# Altium PCB powersupply.PcbDoc
Units mil, origin at the board's own origin, x right, y up, seen from the top; angles counter-clockwise.
Board outline 6955 x 4000 mil, 2 copper layers (Top Layer, Bottom Layer); 37 components, 15 nets, 77 pads, 2 vias.
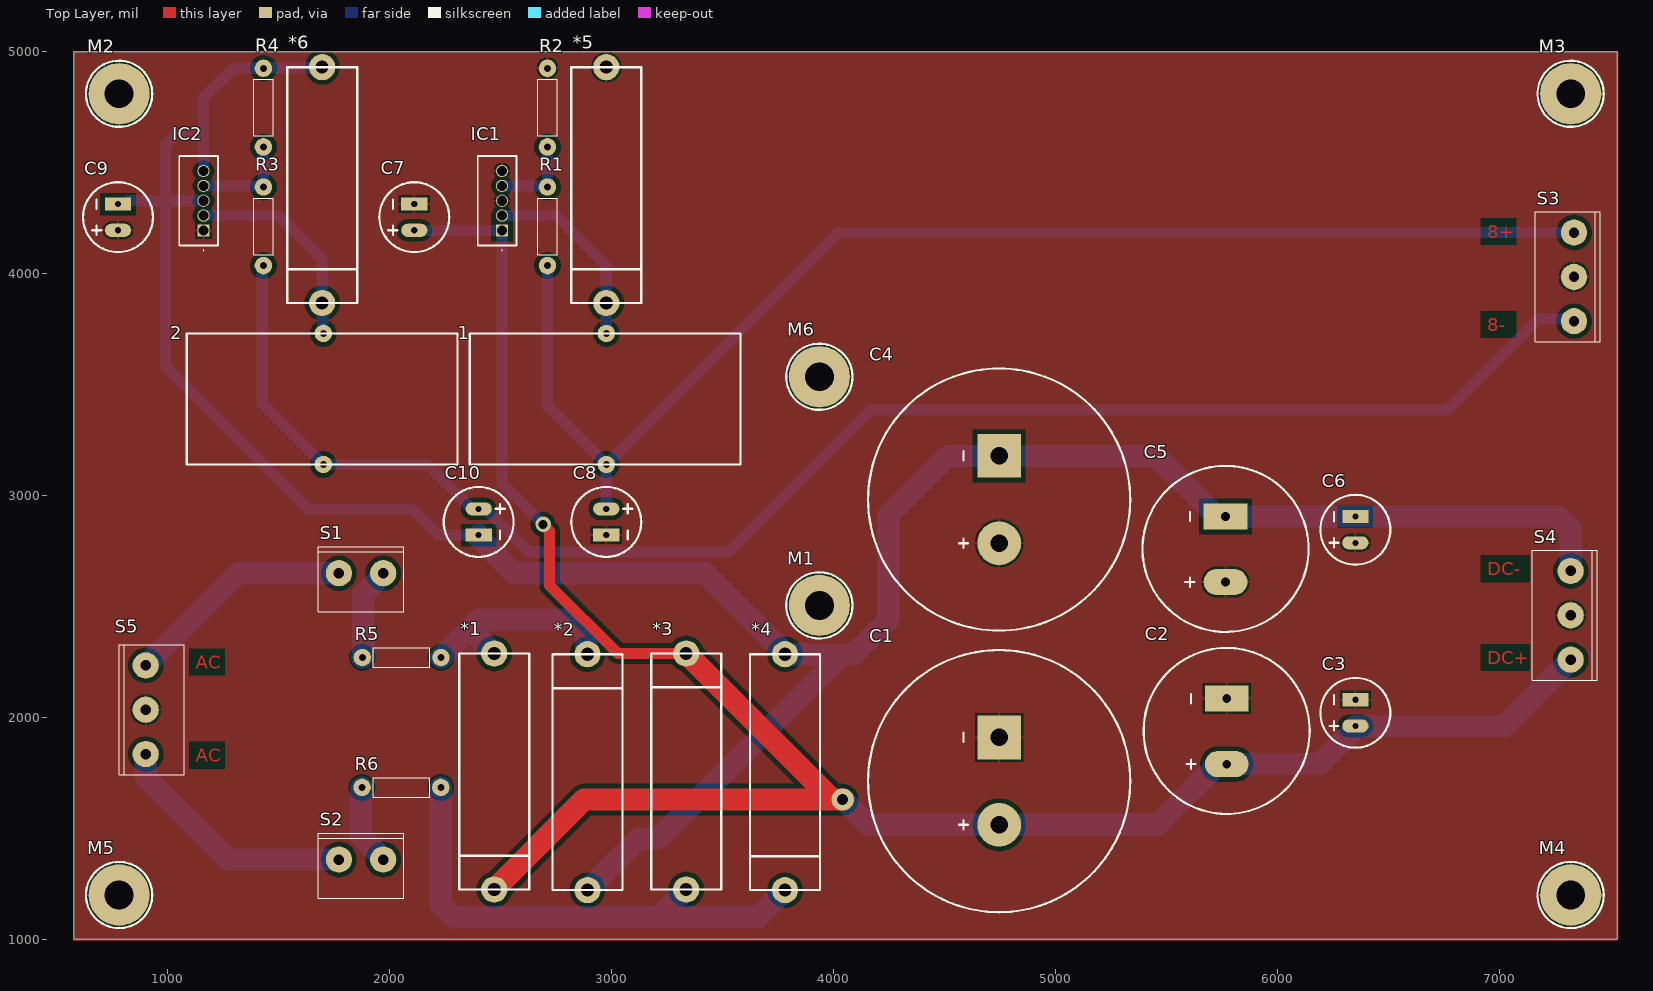
[diagram p0: Top Layer view]
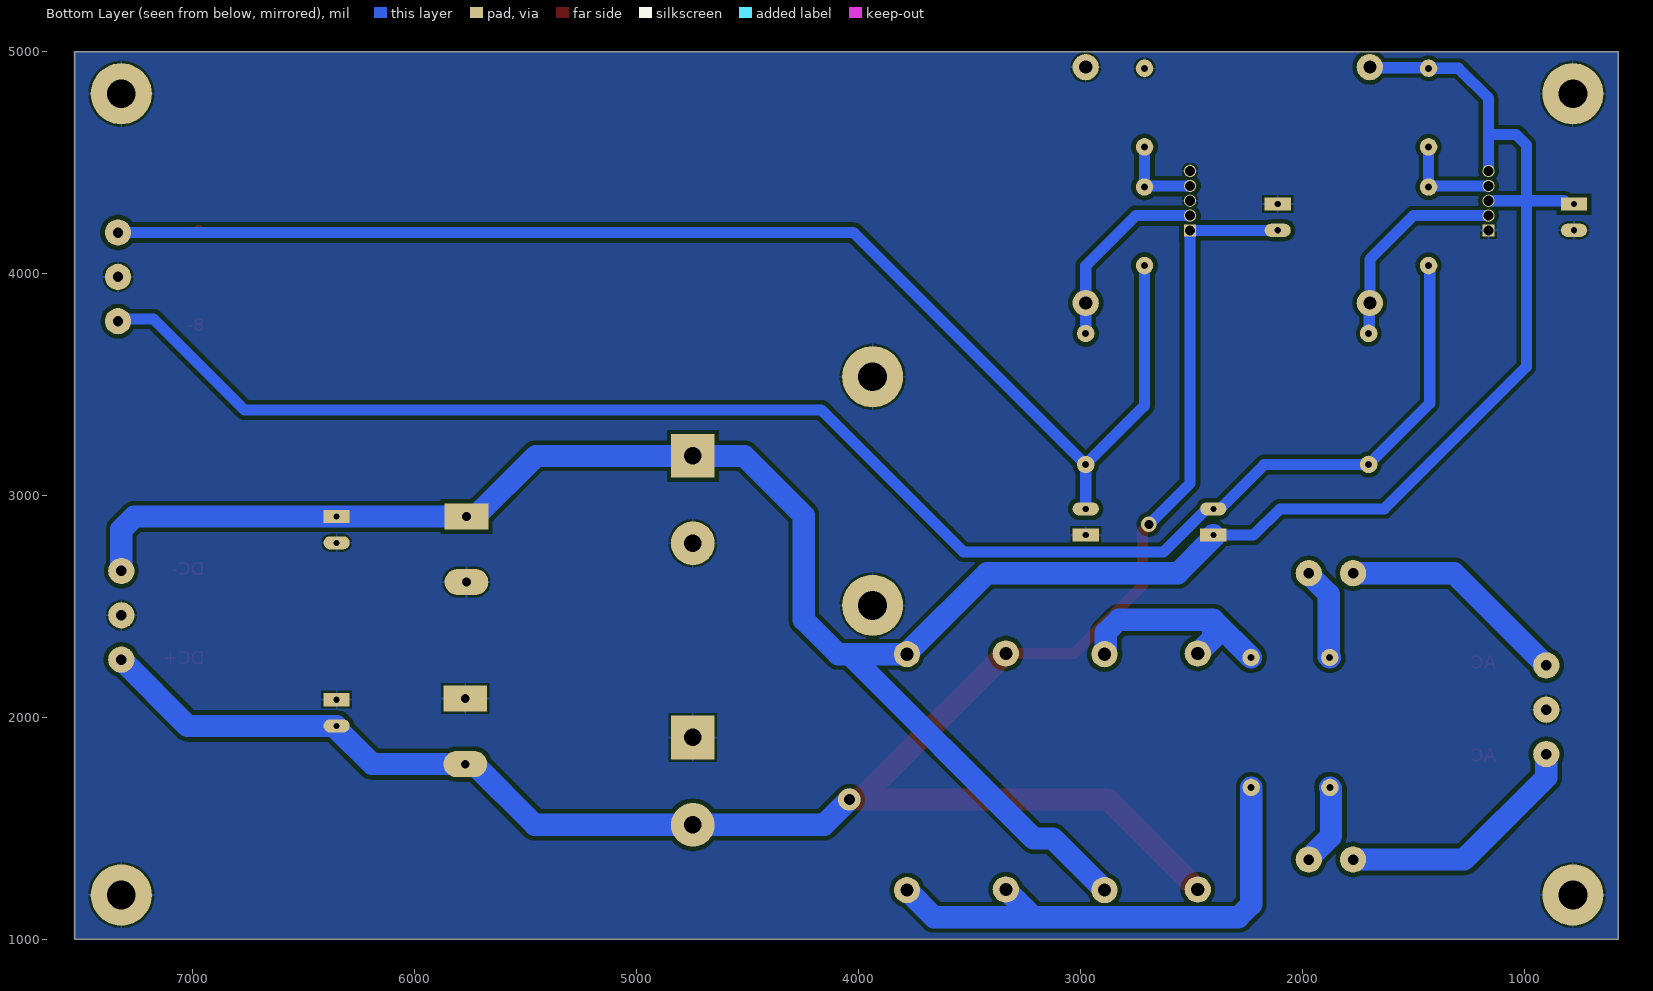
[diagram p1: Bottom Layer view, seen from below]
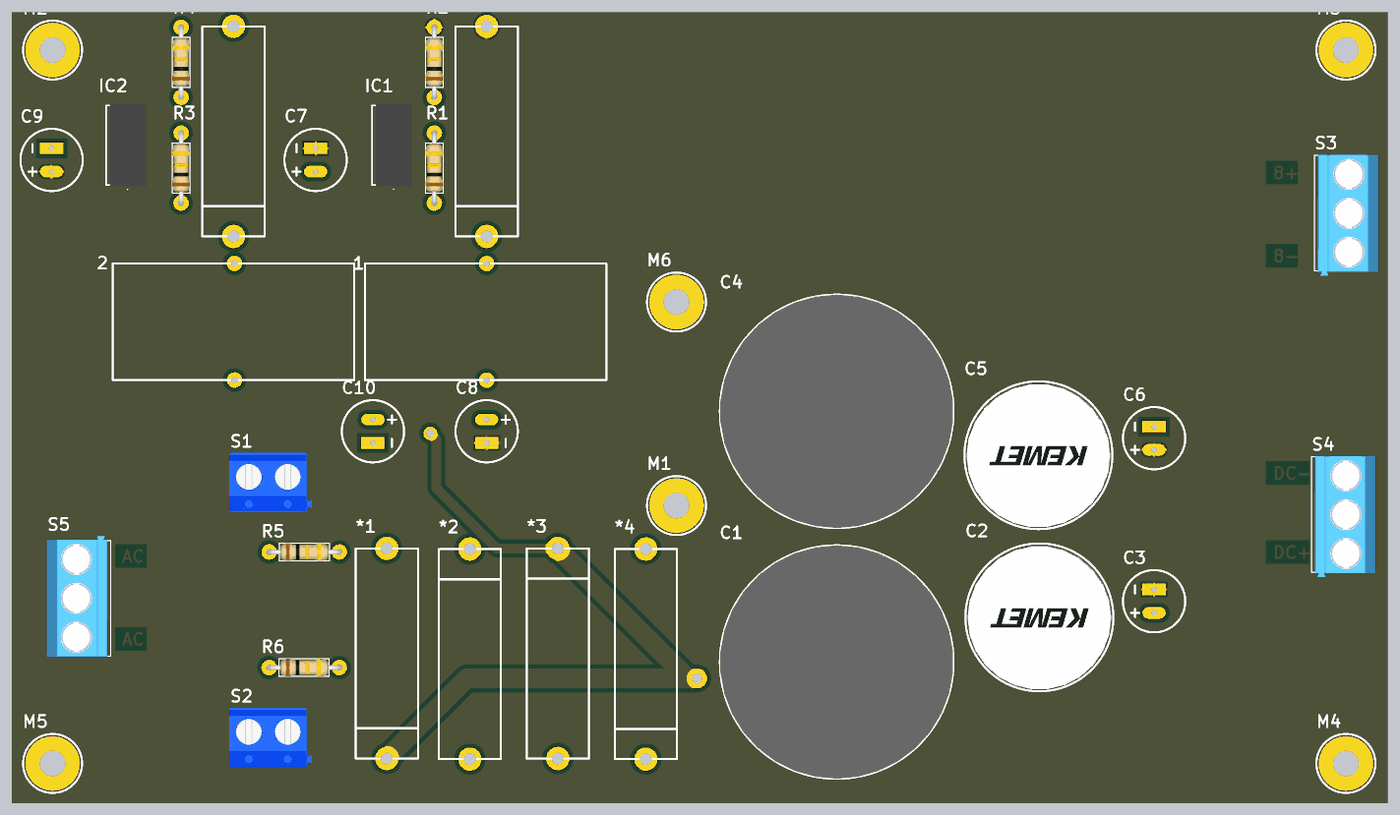
[diagram p2: 3D render of the assembled board from above, using the file's embedded part models]

## Layer stack, top to bottom
Top Solder: solder mask 0.4, Solder Resist, Dk 3.5
Top Layer: signal copper 1.4
Dielectric 1: dielectric 12.6, FR-4, Dk 4.8
Bottom Layer: signal copper 1.4
Bottom Solder: solder mask 0.4, Solder Resist, Dk 3.5

## Board outline
575,1000 7530,1000 7530,5000 575,5000

## Design rules (kind name [scope] priority, off if disabled: settings)
Clearance [All] p1: gap=20 ignorepadtopadclearanceinfootprint=TRUE except(10: Arc-THPad Track-THPad THPad-THPad)
PolygonConnect [All] p1: connectstyle=Relief reliefconductorwidth=10 reliefentries=4 polygonreliefangle="90 Angle" airgapwidth=10
RoutingVias [All] p1: holewidth=28 width=50 viastyle="Through Hole" minholewidth=28 minwidth=50 maxholewidth=28 maxwidth=50
SolderMaskExpansion [All] p1: expansion=4 istentingtop=FALSE
Width [All] p1: maxlimit=100 minlimit=50 preferedwidth=50
30 further rules are at their usual default settings.

## Components (designator, comment, footprint, x,y, rotation, side; value= is the part's Value field where it differs from the comment)
1 "RSPROInductor" "RS PRO inductor" 2975,3730 r270 top
2 "RSPROInductor" "RS PRO inductor" 1700,3730.55 r270 top
*1 "powerdiode" BY214-50 2470,2287.99 r270 top
*2 "powerdiode" BY214-50 2890,1222.01 r90 top
*3 "powerdiode" BY214-50 3335,1225 r90 top
*4 "powerdiode" BY214-50 3780,2285 r270 top
*5 "powerdiode" BY214-50 2975,4930 r270 top
*6 "powerdiode" BY214-50 1695,4930 r270 top
C1 "Cap" "Cap Lyt Ø30" 4745,1516.3 r90 top
C2 "Cap" "Cap Lyt Ø18" 5770,1789.72 r90 top
C3 "Cap" "Cap Lyt Ø8" 6350,1961.89 r90 top
C4 "Cap" "Cap Lyt Ø30" 4745,2785 r90 top
C5 "Cap" "Cap Lyt Ø18" 5765,2610 r90 top
C6 "Cap" "Cap Lyt Ø8" 6350,2786.89 r90 top
C7 "Cap" "Cap Lyt Ø8" 2110,4195 r90 top
C8 "Cap" "Cap Lyt Ø8" 2975,2940 r270 top
C9 "Cap" "Cap Lyt Ø8" 775,4195 r90 top
C10 "Cap" "Cap Lyt Ø8" 2400,2940 r270 top
IC1 "LM2575T-5G" LM2575T5G 2505,4193.98 r90 top
IC2 "LM2575T-5G" LM2575T5G 1160,4193.98 r90 top
M1 "Screw Hole" "M3 Hole" 3935,2505 r0 top
M2 "Screw Hole" "M3 Hole" 780,4810 r0 top
M3 "Screw Hole" "M3 Hole" 7320,4810 r0 top
M4 "Screw Hole" "M3 Hole" 7320,1200 r0 top
M5 "Screw Hole" "M3 Hole" 780,1200 r0 top
M6 "Screw Hole" "M3 Hole" 3935,3535 r0 top
R1 "Resistor" "RES THT 9mm" 2710,4390 r270 top
R2 "Resistor" "RES THT 9mm" 2710,4925 r270 top
R3 "Resistor" "RES THT 9mm" 1430,4390 r270 top
R4 "Resistor" "RES THT 9mm" 1430,4925 r270 top
R5 "Resistor" "RES THT 9mm" 2230,2270 r180 top
R6 "Resistor" "RES THT 9mm" 2229.33,1685 r180 top
S1 "Screw 2" Screw-2 1970,2650 r180 top
S2 "Screw 2" Screw-2 1970,1360 r180 top
S3 "Screw 3" Screw-3 7335,3785.2 r90 top
S4 "Screw 3" Screw-3 7320,2260.39 r90 top
S5 "Screw 3" Screw-3 900,2234.61 r270 top

## Footprints (in the part's own frame and the unit in brackets; to place one, negate y for a bottom-side part, rotate by r counter-clockwise, add the part's x,y. Pads: shape width x height; smd on the part's side, far side on the other; paste and mask are expansions set on the pad)
BY214-50 [mm]
  round 3 hole 1.5: 1(0,0) 2(27,0)
  silkscreen extent 0,-4 27,4
"Cap Lyt Ø8" [mm] "Capacitor"
  oval 1.5x3 hole 0.7: 1(0,0)
  rect 1.5x3 hole 0.7: 2(3,0)
  silkscreen extent -2.5,-4 5.5,4
"Cap Lyt Ø18" [mm] "Capacitor"
  oval 3x5 hole 1: 1(0,0)
  rect 3x5 hole 1: 2(7.5,0)
  silkscreen extent -5.7,-9.5 13.3,9.5, body extent -5.5,-9.25 13,9.25, height 38
"Cap Lyt Ø30" [mm] "Capacitor"
  round 5 hole 2: 1(0,0)
  rect 5x5 hole 2: 2(10,0)
  silkscreen extent -10,-15 20,15, body extent -10,-14.97 20,14.97, height 52.1
LM2575T5G [mm]
  rect 1.4x1.4 hole 1.15: 1(0,0)
  round 1.4 hole 1.15: 2(1.702,0) 3(3.404,0) 4(5.106,0) 5(6.808,0)
  silkscreen extent -2.3,-1.66 8.52,2.78, body extent -1.87,-2.29 8.67,2.29, height 15.57
"M3 Hole" [mm]
  round 7 hole 3.3 mask+0: 1(0,0)
  silkscreen extent -3.78,-3.78 3.79,3.78
"RES THT 9mm" [mm]
  round 2 hole 0.8: 1(0,0) 2(9,0)
  silkscreen extent 1.28,-1.12 7.73,1.12, body extent -0.32,-1.13 9.28,1.14, height 2.36
"RS PRO inductor" [mm]
  round 2 hole 0.8: 1(0,0) 2(15,0)
  silkscreen extent 0,-15.63 15,15.37
Screw-2 [mm] "Screw Terminal with 2 connections"
  round 3 hole 1.2: 1(0,0) 2(5.075,0)
  silkscreen extent -2.37,-3.03 7.45,4.43, body extent -3.07,-3.1 7.53,4.5, height 10
Screw-3 [mm] "Screw Terminal with 3 connections"
  round 3 hole 1.2: 1(0,0) 2(5.075,0) 3(10.15,0)
  silkscreen extent -2.37,-3.03 12.52,4.43, body extent -2.95,-3.8 12.55,4, height 10.3

## Part data
1 2: library part "homemade inductor"
*1 *2 *3 *4 *5 *6: "50V/6A Powerdiode"
C1 C4: library part "Capacitor electrolytic", Capacity=10mF
C2 C5: library part "Capacitor electrolytic", Capacity=2200uF
C3 C6: library part "Capacitor electrolytic", Capacity=220uF
C7 C9: library part "Capacitor electrolytic", Capacity=100uF
C8 C10: library part "Capacitor electrolytic", Capacity=330uF
IC1 IC2: "Integrated Circuit", Manufacturer_Name=onsemi, Mouser Part Number=863-LM2575T-5G, Arrow Part Number=LM2575T-5G, Arrow Price/Stock=https://www.arrow.com/en/products/lm2575t-5g/on-semiconductor?region=nac, Datasheet Link=https://www.onsemi.com/pdf/datasheet/lm2575-d.pdf, Height=15.57mm, Manufacturer_Part_Number=LM2575T-5G, Mouser Price/Stock=https://www.mouser.co.uk/ProductDetail/onsemi/LM2575T-5G?qs=2OtswVQKCOGF4zi2cBc3%2FQ%3D%3D
R1 R2 R3 R4 R5 R6: Ohm=1K

## Via types
v1: diameter 70, hole 40, Top Layer to Bottom Layer, 1 vias
v2: diameter 100, hole 50, Top Layer to Bottom Layer, 1 vias

## Nets (pads, with @x,y where several pads share a name; then routed paths per layer and width w, separated by ;. In a path a pad name is that pad's centre, name@x,y a point inside that pad or via, vN(x,y) a via of type N, cw(c..) or ccw(c..) an arc to the next point about the centre after c; other vN are vias at no path point)
+8: 1.2 C8.1 R1.2 S3.3 | length 5998.4
  Bottom Layer w50: R1.2 2710,3404.45 1.2 ; C8.1 1.2 ; S3.3 4020.35,4184.8 1.2
-8: 2.2 C10.1 R3.2 S3.1 | length 7249.2
  Bottom Layer w50: R3.2 1425,4030.67 1425,3415 2.2 2170.47,3140 2370.47,2940 C10.1 2402.96,2937.04 2432.49,2937.04 2624.53,2745 3525,2745 4165,3385 6765,3385 7175,3795 7325.2,3795 S3.1
DC+: *1.2 *3.2 C1.1 C2.1 C3.1 C7.1 IC1.1 S4.1 | length 9135.9
  Top Layer w50: v1(2690,2870) 2720,2840 2720,2595 3027.01,2287.99 *3.2
  Top Layer w100: *1.2 2875,1630 v2@3992.99,1630 ; *3.2 v2@3992.99,1630 ; v2(4040,1630) v2@3992.99,1630
  Bottom Layer w50: C7.1 2110.51,4194.49 2504.49,4194.49 IC1.1 2505,3055 v1(2690,2870)
  Bottom Layer w100: v2(4040,1630) 4153.7,1516.3 C1.1 5457.2,1516.3 5730.63,1789.72 C2.1 6189.25,1789.72 6350,1950.47 C3.1 7021.5,1961.89 S4.1
DC-: *2.1 *4.1 *6.1 C4.2 C5.2 C6.2 C9.2 C10.2 IC2.3 IC2.5 R4.1 S4.3 | length 11937.3
  Bottom Layer w50: C9.2 804.53,4313.11 819.41,4327.99 989.7,4327.99 ; IC2.3 989.7,4327.99 ; IC2.5 1160,4626 ; *6.1 1692.5,4927.5 1432.5,4927.5 R4.1 1295,4925 1160,4790 1160,4626 ; C10.2 2218.11,2821.89 2100,2940 1630,2940 989.7,3580.3 989.7,4327.99 ; 989.7,4327.99 989.7,4579.7 1036,4626 1160,4626
  Bottom Layer w100: C10.2 2400,2810.47 2560.47,2650 3420,2650 3780,2290 *4.1 4090,2285 4245,2440 4245,2910 4513.7,3178.7 5452.2,3178.7 5725.63,2905.28 C5.2 5765.14,2905.14 6349.86,2905.14 C6.2 7261.42,2905 7320,2846.42 S4.3 ; *2.1 3122.99,1455 3210,1455 4040,2285
GND: *5.1 C1.2 C2.2 C3.2 C4.1 C5.1 C6.1 C7.2 C8.2 C9.1 IC1.3 IC1.5 IC2.1 M1.1 M2.1 M3.1 M4.1 M5.1 M6.1 R2.1 S3.2 S4.2 S5.2
Net1_1: 1.1 *5.2 IC1.2 | length 868.6
  Bottom Layer w50: IC1.2 2749.02,4260.98 2975,4035 *5.2 1.1
Net2_1: 2.1 *6.2 IC2.2 | length 952.7
  Bottom Layer w50: IC2.2 1499.02,4260.98 1695,4065 *6.2 1697.5,3864.51 1697.5,3733.05 2.1
NetIC1_4: IC1.4 R1.1 R2.2 | length 387.7
  Bottom Layer w50: IC1.4 2505.98,4394.02 2705.98,4394.02 R1.1 R2.2
NetIC2_4: IC2.4 R3.1 R4.2 | length 452.7
  Bottom Layer w50: IC2.4 1160.98,4394.02 1425.98,4394.02 R3.1 R4.2
NetR5_2: R5.2 S1.1 | length 419.1
  Bottom Layer w100: R5.2 1880,2274.33 1880,2555.1 1970,2645.1 S1.1
NetR6_2: R6.2 S2.1 | length 368.5
  Bottom Layer w100: R6.2 1870,1680 1870,1464.9 1970,1364.9 S2.1
NetS1_2: S1.2 S5.1 | length 1042.3
  Bottom Layer w100: S5.1 1315.39,2650 S1.2
NetS2_2: S2.2 S5.3 | length 1128.5
  Bottom Layer w100: S5.3 900,1730 1270,1360 S2.2
VCC: *1.1 *2.2 R5.1 | length 1029.2
  Bottom Layer w100: R5.1 2400,2440 ; *1.1 2400,2357.99 2400,2440 ; *2.2 2885,2290 2885,2381.42 2826.42,2440 2400,2440
VDD: *3.1 *4.2 R6.1 | length 2328.7
  Bottom Layer w100: R6.1 2229.33,1158.58 2287.91,1100 3210,1100 ; *3.1 3210,1100 ; *4.2 3657.99,1100 3210,1100

## Polygon pours and split planes (outlines as drawn)
GND on Bottom Layer "GND_L02_P000" (solid, pour order 0): 7535,5000 7535,1005 575,1005 575,4995 580,5000
GND on Top Layer "GND_L01_P001" (solid, pour order 1): 570,5000 7535,5000 7535,1005 7525,995 575,995 575,5005

## Other copper
Top Layer:
  text "8+" at 6945,4160 h60
  text "8-" at 6945,3740 h60
  text "DC-" at 6945,2640 h60
  text "DC+" at 6945,2240 h60
  text "AC" at 1125,2220 h60
  text "AC" at 1125,1800 h60